# Altium PCB PCB_ESP32-C3-module_2_2024-02-21.pcbdoc
Units mm, origin at the board's own origin, x right, y up, seen from the top; angles counter-clockwise.
Board outline 73.92 x 52.5 mm, 2 copper layers (Top Layer, Bottom Layer); 35 components, 33 nets, 142 pads, 109 vias.
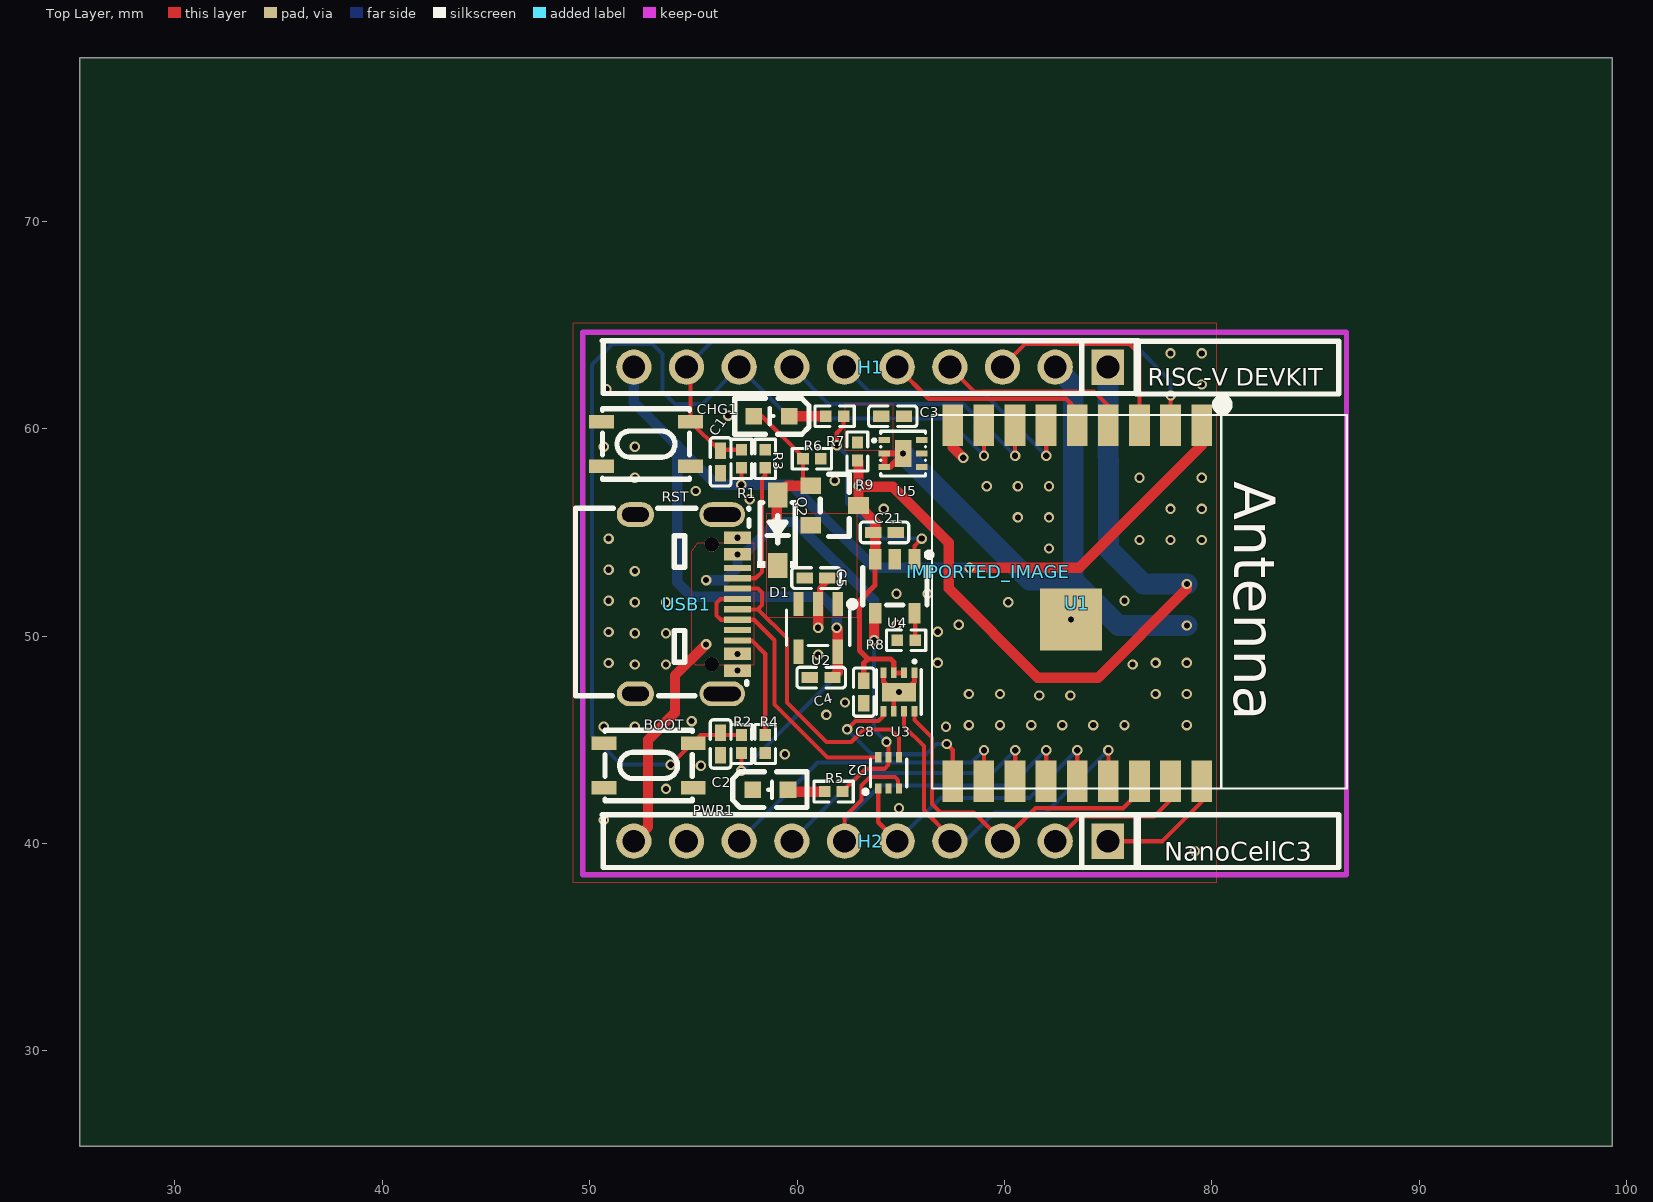
[diagram p0: Top Layer view]
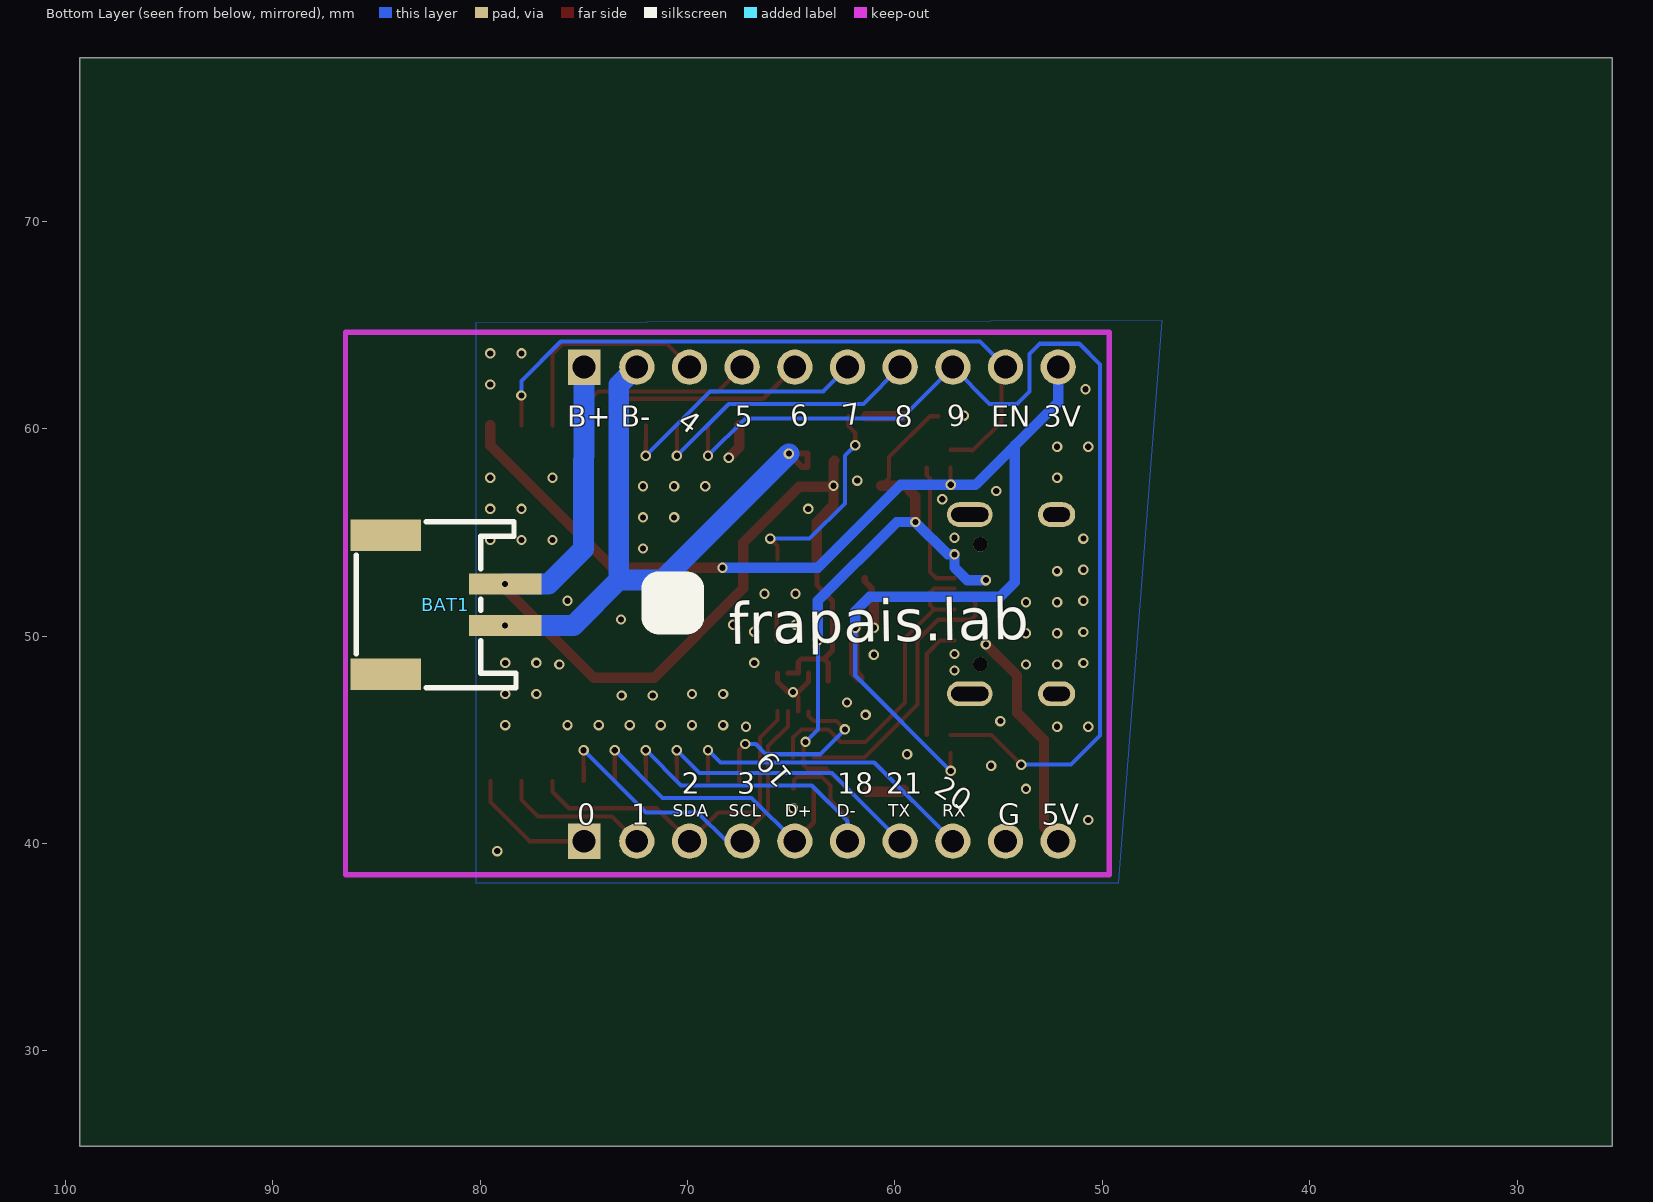
[diagram p1: Bottom Layer view, seen from below]

## Layer stack, top to bottom
Top Layer: signal copper (thickness not stored)
Dielectric: dielectric 0.32, FR-4, Dk 4.8
Bottom Layer: signal copper (thickness not stored)

## Board outline
99.321,25.4 25.4,25.4 25.4,77.9 99.321,77.9

## Components (designator, comment, footprint, x,y, rotation, side; value= is the part's Value field where it differs from the comment)
BAT1 "KH-A2001WF-02A" CONN-SMD_KH-A2001WF-02A 81.674,51.512 r90 bottom
BOOT "TSA016A2518C" SW-SMD_4P-L4.2-W3.3-P2.15-LS4.6 52.844,43.764 r0 top
C1 "100nF" C0402 56.315,58.4 r90 top
C2 "100nF" C0402 56.315,44.8 r90 top
C3 "100nF" C0402 64.615,60.6 r180 top
C4 "10uF" C0402 61.165,48 r0 top
C5 "10uF" C0402 60.915,52.8 r180 top
C8 "100nF" C0402 63.215,47.3 r90 top
C21 "10uF" C0402 64.215,55 r180 top
CHG1 "MHT192CSCT" LED0603-R-RD_ORANGE 58.765,60.6 r180 top
D1 "B5819W_C8598" SOD-123_L2.7-W1.6-LS3.7-RD-1 59.065,55.1 r90 top
D2 "USBLC6-2P6_C2827693" SOT-666-6_L1.6-W1.2-P0.50-LS1.6-BL 64.415,43.4 r0 top
H1 "DZ254R-11-10-63" HDR-TH_10P-P2.54-V-M 63.56,62.97 r180 top
H2 "DZ254R-11-10-63" HDR-TH_10P-P2.54-V-M 63.56,40.11 r180 top
IMPORTED_IMAGE "IMPORTED_IMAGE" IMPORTED_IMAGE 69.215,53.1 r0 top
PWR1 "E6C0603CWAY1UDA" LED0603-R-RD_WHITE 58.715,42.6 r0 top
Q2 "AO3401A" SOT-23_L2.9-W1.3-P0.95-LS2.4-BR 61.815,56.3 r180 top
R1 "10kΩ" R0402 57.315,58.55 r270 top
R2 "10kΩ" R0402 57.315,44.8 r270 top
R3 "5.1kΩ" R0402 58.465,58.55 r90 top
R4 "5.1kΩ" R0402 58.465,44.8 r90 top
R5 "330" R0402 61.765,42.5 r180 top
R6 "100K" R0402 60.715,58.55 r180 top
R7 "330" R0402 61.815,60.6 r0 top
R8 "2K" R0402 65.265,49.8 r0 top
R9 "100Ω" R0402 62.915,58.9 r90 top
RST "TSA016A2518C" SW-SMD_4P-L4.2-W3.3-P2.15-LS4.6 52.717,59.258 r0 top
U1 "ESP32-­C3­-WROOM­-02" FOOTPRINT-ESP32-C3-WROOM-02 79.51,60.159 r270 top
U2 "HE9073A30M5R" SOT-23-5_L3.0-W1.7-P0.95-LS2.8-BL 61.015,50.4 r180 top
U3 "MAX17048G+T10" DFN-8_L2.0-W2.0-P0.50-BL-EP 64.915,47.3 r180 top
U4 "TP4065" SOT-23-5_L3.0-W1.7-P0.95-LS2.8-BR 64.715,52.4 r90 top
U5 "AP6680ZF" DFN-6_L2.0-W2.0-P0.65-BL-EP1.2 65.115,58.8 r270 top
USB1 "U262-16XN-4BVC11" USB-3.1-SMD_U262-161N-4BVC11 54.67,51.54 r270 top
? "" ? 47.331,51.546 r0 top
? "" ? 43.788,51.519 r0 top

## Footprints (in the part's own frame and the unit in brackets; to place one, negate y for a bottom-side part, rotate by r counter-clockwise, add the part's x,y. Pads: shape width x height; smd on the part's side, far side on the other; paste and mask are expansions set on the pad)
C0402 [mm]
  rect 0.79x0.54 smd paste-100 mask+0.051: 1(-0.545,0) 2(0.545,0)
  silkscreen extent -1.17,-0.5 1.17,0.5
CONN-SMD_KH-A2001WF-02A [mm]
  rect 1x3.5 smd paste+0 mask+0.05: 1(1,-2.875) 2(-1,-2.875)
  rect 1.5x3.4 smd paste+0 mask+0.05: 3(-3.35,2.875) 4(3.35,2.875)
  silkscreen extent -4,-3.4 4,4.3
DFN-6_L2.0-W2.0-P0.65-BL-EP1.2 [mm]
  rect 0.28x0.55 smd paste+0 mask+0.05: 1(-0.65,-0.9) 2(0,-0.9) 3(0.65,-0.9) 4(0.65,0.9) 5(0,0.9) 6(-0.65,0.9)
  rect 1.3x0.8 smd paste+0 mask+0.05: 7(0,0)
  silkscreen extent -1.08,-1.47 1.08,1.08
DFN-8_L2.0-W2.0-P0.50-BL-EP [mm]
  rect 0.28x0.505 smd paste+0 mask+0.051: 1(-0.75,-0.928) 2(-0.25,-0.928) 3(0.25,-0.928) 4(0.75,-0.928) 5(0.75,0.928) 6(0.25,0.928) 7(-0.25,0.928) 8(-0.75,0.928)
  rect 1.65x0.9 smd paste+0 mask+0.051: 9(0,0)
  silkscreen extent -1.08,-1.55 1.08,1.08
FOOTPRINT-ESP32-C3-WROOM-02 [mm]
  rect 2x1 smd paste+0 mask+0.05: 1(0,0) 2(0,-1.5) 3(0,-3) 4(0,-4.5) 5(0,-6) 6(0,-7.5) 7(0,-9) 8(0,-10.5) 9(0,-12) 10(17.15,-12) 11(17.15,-10.5) 12(17.15,-9) 13(17.15,-7.5) 14(17.15,-6) 15(17.15,-4.5) 16(17.15,-3) 17(17.15,-1.5) 18(17.15,0)
  rect 3x3 smd paste+0 mask+0.05: 19(9.36,-6.3)
  silkscreen extent -1.25,-13 17.5,7
HDR-TH_10P-P2.54-V-M [mm]
  rect 1.575x1.7 hole 1.1 paste+0 mask+0.051: 1(-11.43,0)
  round 1.7 hole 1.1 paste+0 mask+0.051: 2(-8.89,0) 3(-6.35,0) 4(-3.81,0) 5(-1.27,0) 6(1.27,0) 7(3.81,0) 8(6.35,0) 9(8.89,0) 10(11.43,0)
  silkscreen extent -12.9,-1.27 12.95,1.27
IMPORTED_IMAGE [mm]
LED0603-R-RD_ORANGE [mm]
  rect 0.8x0.8 smd paste+0 mask+0.051: 1(0.851,0) 2(-0.851,0)
  silkscreen extent -1.82,-0.86 1.77,0.86
LED0603-R-RD_WHITE [mm]
  rect 0.8x0.8 smd paste+0 mask+0.051: 1(0.851,0) 2(-0.851,0)
  silkscreen extent -1.82,-0.86 1.77,0.86
R0402 [mm]
  rect 0.566x0.54 smd paste-100 mask+0.051: 1(-0.433,0) 2(0.433,0)
  silkscreen extent -0.94,-0.5 0.94,0.5
SOD-123_L2.7-W1.6-LS3.7-RD-1 [mm]
  rect 1.2x0.95 smd paste+0 mask+0.051: 1(-1.7,0) 2(1.7,0)
  silkscreen extent -1.81,-0.98 1.35,0.98
SOT-23-5_L3.0-W1.7-P0.95-LS2.8-BL [mm]
  rect 0.49x1.157 smd paste+0 mask+0.051: 1(-0.95,-1.154) 2(0,-1.154) 3(0.95,-1.154)
  rect 0.49x1.175 smd paste+0 mask+0.051: 4(0.95,1.154) 5(-0.95,1.154)
  silkscreen extent -1.8,-1.29 1.53,0.85
SOT-23-5_L3.0-W1.7-P0.95-LS2.8-BR [mm]
  rect 1x0.6 smd paste+0 mask+0.051: 1(1.3,-0.95) 2(1.3,0) 3(1.3,0.95) 4(-1.3,0.95) 5(-1.3,-0.95)
  silkscreen extent -0.9,-1.78 1.65,1.55
SOT-23_L2.9-W1.3-P0.95-LS2.4-BR [mm]
  rect 1x0.8 smd paste+0 mask+0.051: 1(1.15,-0.95) 2(1.15,0.95) 3(-1.15,0)
  silkscreen extent -0.7,-1.5 0.7,1.5
SOT-666-6_L1.6-W1.2-P0.50-LS1.6-BL [mm]
  rect 0.3x0.5 smd paste+0 mask+0.051: 1(-0.5,-0.75) 2(0,-0.75) 3(0.5,-0.75) 4(0.5,0.75) 5(0,0.75) 6(-0.5,0.75)
  silkscreen extent -1.21,-1.01 0.88,0.68
SW-SMD_4P-L4.2-W3.3-P2.15-LS4.6 [mm]
  rect 1.2x0.65 smd paste+0 mask+0.051: 1(-2.15,1.075) 2(2.15,1.075) 3(-2.15,-1.075) 4(2.15,-1.075)
  silkscreen extent -2.1,-1.7 2.1,1.7
USB-3.1-SMD_U262-161N-4BVC11 [mm]
  rect 0.6x1.3 smd paste-100 mask+0.051: A1B12(-3.2,2.461) A4B9(-2.4,2.461) B1A12(3.2,2.461) B4A9(2.4,2.461)
  rect 0.3x1.3 smd paste-100 mask+0.051: A5(-1.25,2.461) A6(-0.25,2.461) A7(0.25,2.461) A8(1.25,2.461) B5(1.75,2.461) B6(0.75,2.461) B7(-0.75,2.461) B8(-1.75,2.461)
  oval 1.2x2.2 hole 0.7 slot 1.8 at 90 deg paste+0 mask+0.051: SHELL(-4.32,1.719) SHELL(4.32,1.719)
  oval 1.2x1.8 hole 0.7 slot 1.3 at 90 deg paste+0 mask+0.051: SHELL(-4.32,-2.461) SHELL(4.32,-2.461)
  round 0.7 hole 0.7 unplated paste+0: ""(-2.89,1.219) ""(2.89,1.219)
  silkscreen extent -4.62,-5.35 4.42,3.01
? [mm]

## Via types
v1: diameter 0.5, hole 0.3, Top Layer to Bottom Layer, tented both sides, 109 vias

## Nets (pads, with @x,y where several pads share a name; then routed paths per layer and width w, separated by ;. In a path a pad name is that pad's centre, name@x,y a point inside that pad or via, vN(x,y) a via of type N, cw(c..) or ccw(c..) an arc to the next point about the centre after c; other vN are vias at no path point)
3V: C4.2 H1.10 R1.2 R2.2 U1.1 U2.5 | length 64.5
  Top Layer w0.2: v1(57.314,43.5) R2.2 ; v1(57.314,57.3) R1.2
  Top Layer w0.5: C4.2 61.964,48.255 U2.5 ; v1(61.914,50.4) 61.965,50.35 U2.5 ; v1(68.314,53.3) 73.615,53.3 79.508,59.194 U1.1@79.508,60.16
  Bottom Layer w0.2: v1(57.314,43.5) 61.914,48.1 v1(61.914,50.4)
  Bottom Layer w0.5: H1.10 52.13,61.286 56.115,57.3 v1@57.314,57.3 ; 54.215,59.2 54.221,52.593 54.915,51.9 61.215,51.9 61.915,51.2 v1(61.914,50.4) ; v1(57.314,57.3) 59.714,57.3 63.714,53.3 v1(68.314,53.3)
ALRT: U1.10 U3.5 | length 9.7
  Top Layer w0.2: v1(62.415,45.5) 62.815,45.9 63.915,45.9 64.165,46.15 U3.5 ; v1(67.215,44.8) 67.51,44.505 U1.10
  Bottom Layer w0.2: v1(62.415,45.5) 63.615,44.3 66.215,44.3 66.715,44.8 v1(67.215,44.8)
B-: BAT1.2 H1.2 U5.2 U5.3 U5.7 | length 30.5
  Top Layer w0.3: U5.3 64.214,58.8 v1(65.115,58.8) 64.465,58.15 U5.3
  Bottom Layer w1: v1@65.114,58.799 71.213,52.7 73.316,52.7 ; H1.2 73.316,62.103 73.316,52.7 ; BAT1.2@78.8,50.511 75.503,50.511 73.316,52.7
  other v1: 78.799,50.512
BAT1_3: BAT1.3
BAT1_4: BAT1.4
CHG1: R7.2 U4.1 | length 10
  Top Layer w0.2: v1(61.914,59.2) 61.914,59.8 62.247,60.133 R7.2 ; U4.1 65.664,54.35 v1(66.014,54.7)
  Bottom Layer w0.2: v1(61.914,59.2) 62.415,58.7 62.415,56.4 64.115,54.7 v1(66.014,54.7)
CHG2: CHG1.2 R7.1 | length 1.8
  Top Layer w0.5: CHG1.2 R7.1
D00: H2.1 U1.18 | length 6.3
  Top Layer w0.2: H2.1 77.624,40.11 79.51,41.995 U1.18
D01: H2.2 U1.17 | length 7.3
  Top Layer w0.2: H2.2 73.641,41.301 77.215,41.301 78.01,42.096 U1.17
D04: H1.3 U1.3 | length 10.7
  Top Layer w0.2: H1.3 69.91,62.995 71.015,64.1 76.015,64.1 76.51,63.605 U1.3
D05: H1.4 U1.4 | length 9.4
  Top Layer w0.2: H1.4 68.539,61.8 74.315,61.8 75.009,61.105 U1.4
D06: H1.5 U1.5 | length 10.3
  Top Layer w0.2: H1.5 66.353,61.446 72.968,61.446 73.51,60.905 U1.5
D07: H1.6 U1.6 | length 13
  Top Layer w0.2: U1.6 v1(72.014,58.7)
  Bottom Layer w0.2: H1.6 63.461,61.801 68.914,61.801 v1(72.014,58.7)
D08: H1.7 U1.7 | length 14
  Top Layer w0.2: U1.7 70.509,58.705 v1(70.515,58.7)
  Bottom Layer w0.2: H1.7 61.52,61.199 68.015,61.199 v1@70.514,58.7
D09: BOOT.2 C2.2 H1.8 R2.1 U1.8 | length 51.8
  Top Layer w0.2: v1(53.914,43.8) 55.347,45.233 R2.1 ; U1.8 69.009,58.705 v1(69.014,58.7)
  Bottom Layer w0.2: v1(53.914,43.8) 51.515,43.8 50.115,45.2 50.115,63.1 51.115,64.1 53.015,64.1 53.515,63.6 53.515,61.8 54.115,61.2 55.44,61.2 H1.8 59.678,60.501 67.215,60.501 v1(69.014,58.7)
D+: D2.1 H2.5 U1.14 | length 14.9
  Top Layer w0.2: D2.1 63.914,41.025 H2.5 ; U1.14@73.509,43.01 v1@73.514,44.501
  Bottom Layer w0.2: H2.5 66.92,42.2 71.215,42.2 v1@73.514,44.501
  other v1: 73.515,44.5
D-: D2.3 H2.6 U1.13 | length 19.1
  Top Layer w0.2: H2.6 62.29,41.275 63.115,42.101 63.115,42.799 63.516,43.201 64.715,43.201 64.865,43.051 64.865,42.65 D2.3@64.913,42.65 ; U1.13 v1(72.014,44.5)
  Bottom Layer w0.2: H2.6 62.29,41.075 64.014,42.799 70.313,42.799 v1(72.014,44.5)
DN1: D2.4 USB1.A7 USB1.B7 | length 16.7
  Top Layer w0.2: USB1.B7 58.124,52.289 58.314,52.101 58.314,51.499 58.104,51.291 USB1.A7 58.124,51.291 59.513,49.899 59.513,46.8 61.413,44.9 62.615,44.9 63.214,45.499 64.515,45.499 64.913,45.101 D2.4@64.913,44.151
DP1: D2.6 USB1.A6 USB1.B6 | length 14.1
  Top Layer w0.2: USB1.A6@57.131,51.788 56.303,51.788 56.115,51.6 56.115,51.001 56.326,50.79 USB1.B6 57.925,50.789 58.915,49.8 58.915,46.7 61.465,44.15 D2.6
EN: C1.2 H1.9 R1.1 RST.2 U1.2 | length 32.5
  Top Layer w0.2: H1.9 54.867,62.772 RST.2 56.256,58.945 C1.2 56.352,58.983 R1.1 ; U1.2 78.014,60.164 v1(78.014,61.6)
  Bottom Layer w0.2: H1.9 55.9,64.2 76.114,64.2 78.014,62.3 v1(78.014,61.6)
GND: BOOT.4 C1.1 C2.1 C3.1 C4.1 C5.1 C8.1 C21.1 D2.2 H2.9 PWR1.2 R3.2 R4.1 R6.1 R8.1 RST.4 U1.9 U1.19 U2.2 U3.1 U3.4 U3.6 U3.9 U4.2 U5.4 U5.5 U5.6 USB1.A1B12 USB1.B1A12 | length 8.2
  Top Layer w0.2: U3.6 64.664,47.05 v1(64.915,47.3)
  Top Layer w0.25: U3.4 64.165,47.8 64.665,47.3 v1(64.915,47.3) 65.164,47.3 65.664,47.8 U3.1
  Top Layer w0.3: U2.2 61.115,51.654 61.115,52.3 61.459,52.645 C5.1
  Top Layer w0.5: v1(61.015,50.4) U2.2 ; U1.9 67.509,59.105 v1(68.014,58.6)
  other v1: 79.182,39.633 50.682,41.133 64.914,41.7 53.682,42.633 55.365,43.75 59.415,44.3 50.682,45.633 52.182,45.633 67.182,45.633 68.289,45.709 69.789,45.709 71.289,45.709 72.789,45.709 74.289,45.709 75.789,45.709 78.789,45.709 54.914,45.9 61.415,46.2 62.314,46.8 71.681,47.133 73.182,47.133 68.289,47.209 69.789,47.209 77.289,47.209 78.789,47.209 57.131,48.34 52.182,48.633 53.682,48.633 76.182,48.633 50.914,48.7 66.789,48.709 77.289,48.709 78.789,48.709 61.015,49.1 52.182,50.133 53.682,50.133 50.914,50.2 66.789,50.209 64.793,50.544 67.793,50.544 73.209,50.8 52.182,51.633 53.682,51.633 70.182,51.633 50.914,51.7 75.789,51.709 64.793,52.043 66.293,52.043 52.182,53.133 50.914,53.2 72.15,54.224 76.511,54.633 78.011,54.633 79.511,54.633 50.914,54.7 57.131,54.739 70.65,55.724 72.15,55.724 64.182,56.133 78.011,56.133 79.511,56.133 57.715,56.6 55.115,57 69.15,57.224 70.65,57.224 72.15,57.224 61.815,57.5 52.182,57.633 76.511,57.633 79.511,57.633 50.682,59.133 52.182,59.133 56.682,60.633 50.815,61.9 79.511,62.133 78.011,63.633 79.511,63.633
PROG: R8.2 U4.5 | length 1.3
  Top Layer w0.2: U4.5 65.697,51.067 R8.2
PWR1_1: PWR1.1 R5.2 | length 1.8
  Top Layer w0.5: PWR1.1 59.666,42.5 R5.2
RX: H2.8 U1.11 | length 15.1
  Top Layer w0.2: U1.11 69.014,43.014 v1(69.014,44.5)
  Bottom Layer w0.2: H2.8 60.999,43.899 68.414,43.899 v1(69.014,44.5)
SCL: H2.4 U1.15 U3.7 | length 18.1
  Top Layer w0.2: U3.7 65.165,45.649 66.115,44.699 66.115,41.601 67.37,40.346 H2.4 ; U1.15 v1(75.014,44.5)
  Bottom Layer w0.2: H2.4 68.124,40.11 69.515,41.5 72.015,41.5 v1(75.014,44.5)
SDA: H2.3 U1.16 U3.8 | length 17.1
  Top Layer w0.2: U3.8 65.665,45.949 66.514,45.101 66.514,41.9 66.915,41.499 68.52,41.499 H2.3 71.5,41.7 75.715,41.7 76.51,42.495 U1.16
TX: H2.7 U1.12 | length 14.1
  Top Layer w0.2: U1.12@70.509,43.01 v1@70.519,44.491
  Bottom Layer w0.2: H2.7 63.039,43.399 69.43,43.399 v1@70.519,44.491
  other v1: 70.52,44.491
U5_1: C3.2 R9.2 U5.1
USB1_A5: R3.1 USB1.A5 | length 6.4
  Top Layer w0.2: USB1.A5 58.004,52.789 58.315,53.1 58.315,57.6 58.465,57.75 R3.1
USB1_B5: R4.2 USB1.B5 | length 5.5
  Top Layer w0.2: USB1.B5 57.824,49.789 58.464,49.149 R4.2@58.464,45.233
VBAT: BAT1.1 C8.2 C21.2 H1.1 Q2.3 R9.1 U3.2 U3.3 U4.3 | length 50.1
  Top Layer w0.25: 63.013,49.599 63.013,49.299 63.415,48.9 ; 63.015,49.6 63.013,51.7 63.765,52.449 U4.3 ; C8.2@63.214,47.844 63.214,48.7 63.415,48.9 ; U3.2 U3.3 64.664,48.751 64.515,48.9 63.415,48.9
  Top Layer w0.5: R9.1@62.914,58.467 62.965,58.417 v1(62.964,57.247) Q2.3 63.765,55.5 U4.3 ; v1(62.964,57.247) 63.011,57.201 64.614,57.201 67.315,54.5 67.315,54.4 67.314,52.299 71.614,47.999 74.515,47.999 78.8,52.284 v1(78.799,52.512)
  Bottom Layer w1: H1.1 75.015,54.199 76.702,52.512 v1(78.799,52.512)
VCC: CHG1.1 D1.2 D2.5 H2.10 Q2.1 R5.1 R6.2 U4.4 USB1.A4B9 USB1.B4A9 | length 42.2
  Top Layer w0.2: CHG1.1 58.315,60.6 60.282,58.633 R6.2 60.282,57.633 Q2.1 ; R5.1 63.298,43.6 64.214,43.6 64.414,43.8 D2.5 ; v1@64.314,44.9 64.416,44.801 D2.5
  Top Layer w0.5: H2.10 52.815,40.795 52.815,44.999 54.113,46.3 54.113,48.1 v1@55.614,49.599 ; v1(59.015,55.5) 59.015,56.75 D1.2 ; D1.2 59.515,57.25 Q2.1 ; v1(63.715,49.8) 63.715,51.05 U4.4
  Bottom Layer w0.2: v1(63.715,49.8) 63.715,45.5 v1(64.314,44.9)
  Bottom Layer w0.5: v1(55.614,52.7) 56.514,52.7 57.131,53.318 v1(57.131,53.94) 57.454,53.94 v1(59.015,55.5) ; v1(59.015,55.5) 59.915,55.499 63.715,51.7 v1(63.715,49.8)
  other v1: 57.131,49.139 55.614,49.6
VIN: C5.2 D1.1 Q2.2 U2.1 U2.3
pads on no net: BOOT.1 BOOT.3 RST.1 RST.3 U2.4 USB1. USB1.A8 USB1.B8 USB1.SHELL

## Polygon pours and split planes (outlines as drawn)
GND on Bottom Layer (solid): 47.115,65.2 80.214,65.1 80.214,38.1 49.215,38.1
U5_1 on Top Layer (solid): 62.315,58.95 62.315,61.2 64.565,61.2 64.615,61.15 64.615,59 64.615,58.95
VIN on Top Layer (solid): 58.515,55.9 58.515,50.9 62.915,50.9 62.915,55.9
VCC on Top Layer (solid): 57.915,48.6 55.115,48.6 54.915,48.8 54.915,54.1 55.215,54.5 57.915,54.5
GND on Top Layer (solid): 49.215,65.1 80.214,65.1 80.214,38.1 49.215,38.1

## Silkscreen, mask and mechanical layers (free items; w line width, h text height)
Top Overlay:
  lines w0.254: 76.341,38.846 86.12,38.846 86.12,41.386 76.341,41.386 76.341,38.846 ; 76.348,61.679 86.127,61.679 86.127,64.219 76.348,64.219 76.348,61.679
  text "RISC-V DEVKIT" at 76.914,62.081 h0.84
  text "NanoCellC3" at 77.715,39.155 h0.89
Bottom Overlay:
  text "4" at 70.548,60.195 h1 r36
  text "7" at 62.419,60.109 h1 r349
  text "3V" at 52.815,60.1 h1
  text "EN" at 55.355,60.1 h1
  text "9" at 57.431,60.102 h1 r355
  text "8" at 60.015,60.1 h1
  text "6" at 65.011,60.102 h1 r355
  text "5" at 67.715,60.1 h1
  text "B-" at 73.214,60.1 h1
  text "B+" at 75.815,60.1 h1
  text "frapais.lab" at 68.001,49.608 h2 r359
  text "19" at 64.892,43.221 h1 r230
  text "20" at 58.187,42.481 h1 r33
  text "21" at 60.415,42.4 h1
  text "18" at 62.774,42.4 h1
  text "3" at 67.614,42.4 h1
  text "2" at 70.275,42.4 h1
  text "RX" at 57.715,41.3 h0.6
  text "TX" at 60.314,41.3 h0.6
  text "D-" at 62.815,41.3 h0.6
  text "D+" at 65.314,41.3 h0.6
  text "SCL" at 68.014,41.3 h0.6
  text "SDA" at 70.715,41.3 h0.6
  text "5V" at 52.914,40.9 h1
  text "G" at 55.015,40.9 h1
  text "1" at 72.715,40.9 h1
  text "0" at 75.314,40.9 h1

## Text inside footprints (layer, text, board x,y; h text height)
U1: Top Overlay "Antenna" at 81.074,57.468 h2 r270